# Altium PCB WAB_1_1_r3.PcbDoc (part 2 of 3)
Units mil, origin at the board's own origin, x right, y up, seen from the top; angles counter-clockwise.
Board outline 2714.17 x 3100 mil, 6 copper layers (TopLayer, GroundPlane1, MidLayer1, MidLayer2, GroundPlane2, BottomLayer), stack 59.8 mil thick; 41 components, 283 nets, 779 pads, 570 vias.
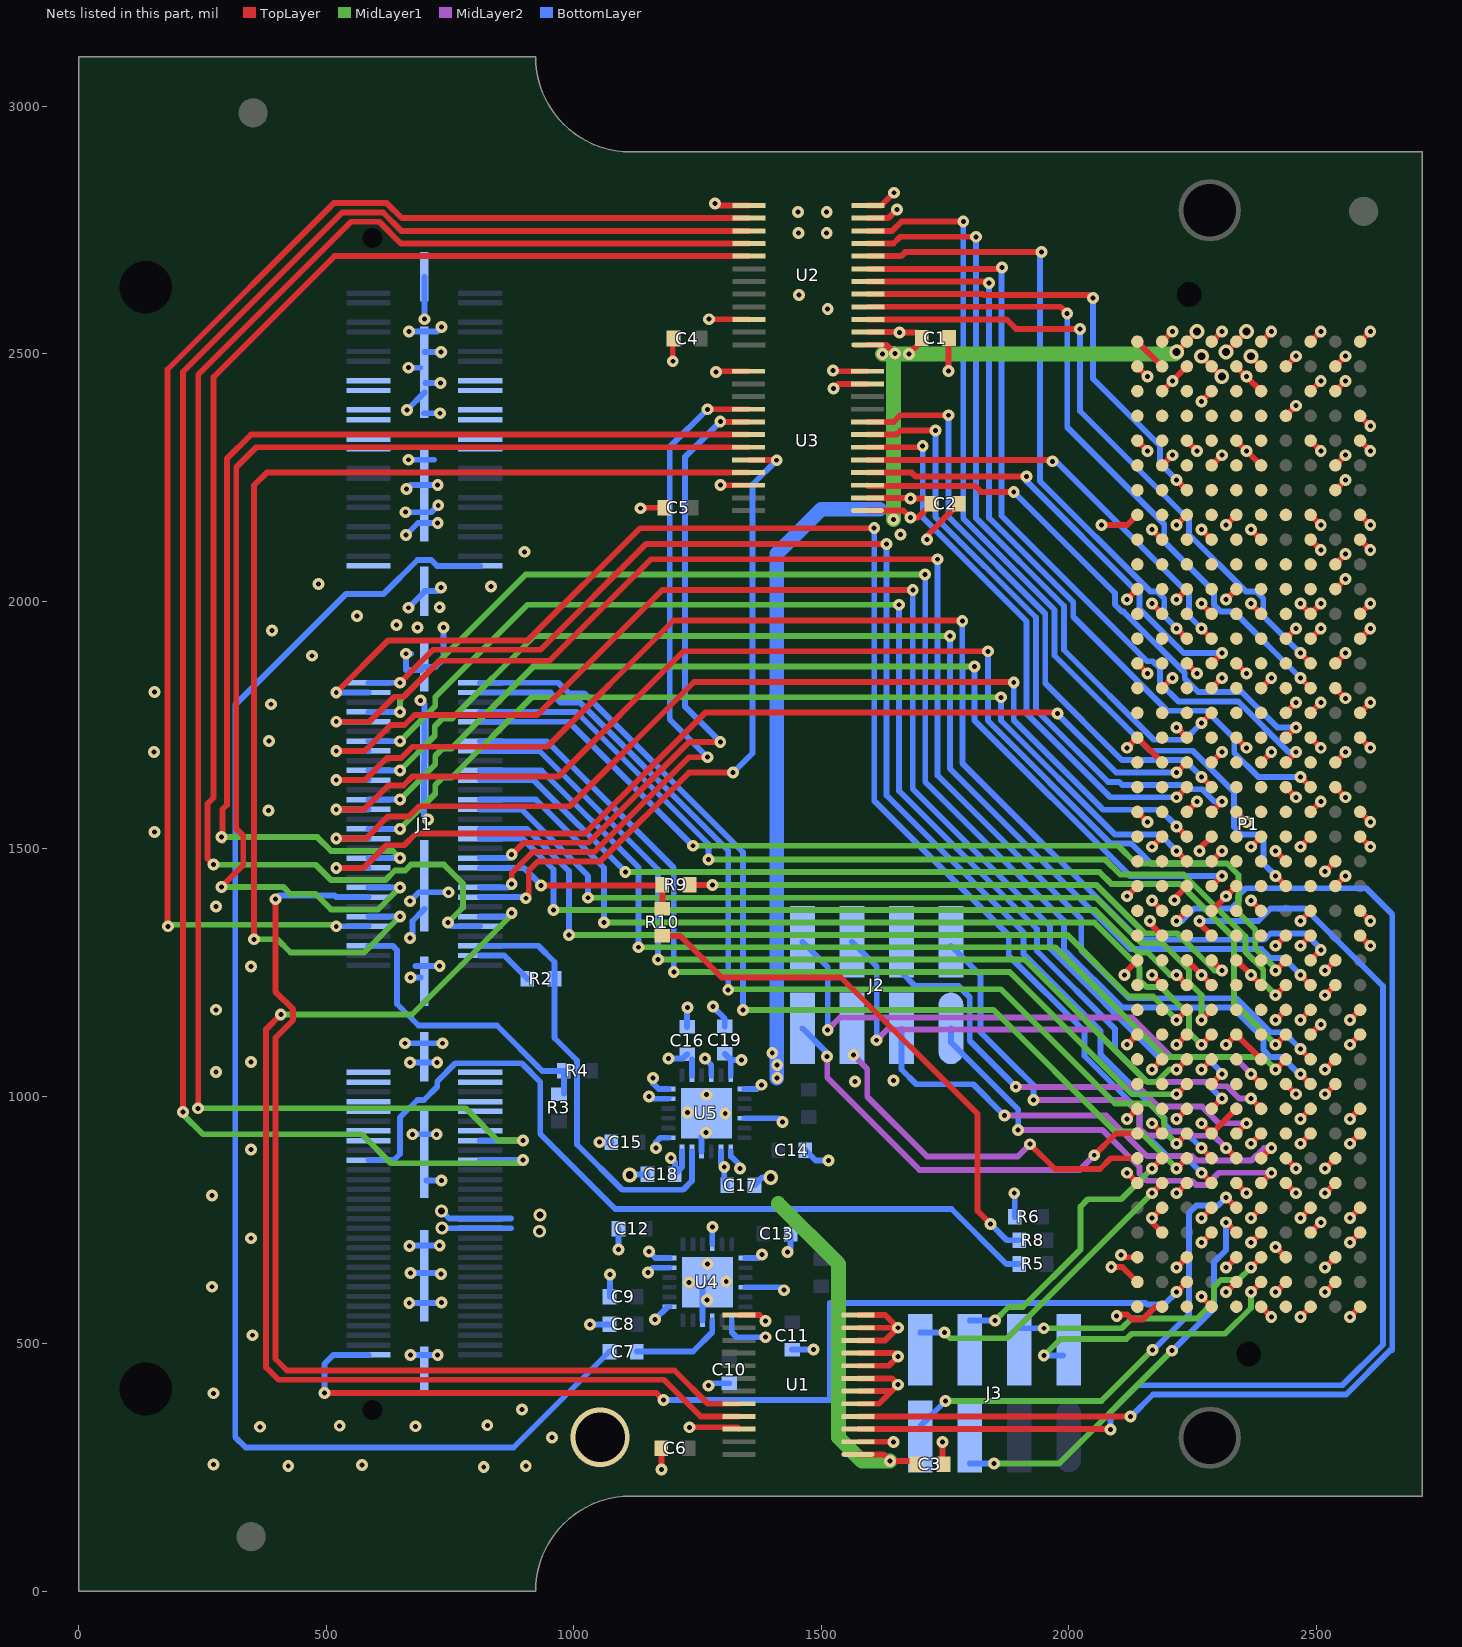
[diagram p6: the nets of this part, all layers, seen from the top]

## Via types
v1: diameter 24, hole 10, TopLayer to BottomLayer, tented both sides, 443 vias
v2: diameter 24, hole 10, TopLayer to BottomLayer, tented top, 56 vias
v3: diameter 26, hole 14, TopLayer to BottomLayer, tented both sides, 33 vias
v4: diameter 30, hole 16, TopLayer to BottomLayer, tented both sides, 32 vias
v5: diameter 250, hole 125, TopLayer to BottomLayer, tented both sides, 4 vias
v6: diameter 120, hole 100, TopLayer to BottomLayer, 1 vias
v7: diameter 24, hole 10, TopLayer to BottomLayer, 1 vias

## Nets (pads, with @x,y where several pads share a name; then routed paths per layer and width w, separated by ;. In a path a pad name is that pad's centre, name@x,y a point inside that pad or via, vN(x,y) a via of type N, cw(c..) or ccw(c..) an arc to the next point about the centre after c; other vN are vias at no path point) (continued)
GND: C1.1 C2.1 C3.1 C4.1 C5.1 C6.1 C8.1 C9.1 C10.1 C11.1 C12.1 C13.1 C14.1 C15.1 C16.1 C17.1 C18.1 C19.1 J1.161 J1.162 J1.163 J1.164 J1.165 J1.166 J1.167 J1.168 J1.169 J1.170 J1.171 J1.172 P1.A1 P1.A4 P1.A5 P1.A8 P1.A9 P1.A12 P1.A13 P1.A16 P1.A17 P1.A20 P1.A21 P1.A24 P1.A25 P1.A28 P1.A29 P1.A32 P1.A33 P1.A36 P1.A37 P1.A40 P1.B2 P1.B3 P1.B6 P1.B7 P1.B10 P1.B11 P1.B14 P1.B15 P1.B18 P1.B19 P1.B22 P1.B23 P1.B26 P1.B27 P1.B30 P1.B31 P1.B34 P1.B35 P1.B38 P1.B39 P1.C1 P1.C4 P1.C5 P1.C8 P1.C9 P1.C12 P1.C13 P1.C16 P1.C17 P1.C20 P1.C21 P1.C24 P1.C25 P1.C28 P1.C29 P1.C32 P1.C33 P1.C36 P1.C38 P1.C40 P1.D2 P1.D3 P1.D6 P1.D7 P1.D10 P1.D13 P1.D16 P1.D19 P1.D22 P1.D25 P1.D28 P1.D37 P1.D39 P1.E1 P1.E4 P1.E5 P1.E8 P1.E11 P1.E14 P1.E17 P1.E20 P1.E23 P1.E26 P1.E29 P1.E32 P1.E35 P1.E38 P1.E40 P1.F2 P1.F3 P1.F6 P1.F9 P1.F12 P1.F15 P1.F18 P1.F21 P1.F24 P1.F27 P1.F30 P1.F33 P1.F36 P1.F39 P1.G1 P1.G4 P1.G5 P1.G8 P1.G11 P1.G14 P1.G17 P1.G20 P1.G23 P1.G26 P1.G29 P1.G32 P1.G35 P1.G38 P1.G40 P1.H3 P1.H6 P1.H9 P1.H12 P1.H15 P1.H18 P1.H21 P1.H24 P1.H27 P1.H30 P1.H33 P1.H36 P1.H39 P1.J1 P1.J4 P1.J5 P1.J8 P1.J11 P1.J14 P1.J17 P1.J20 P1.J23 P1.J26 P1.J29 P1.J32 P1.J35 P1.J38 P1.J40 P1.K2 P1.K3 P1.K6 P1.K9 P1.K12 P1.K15 P1.K18 P1.K21 P1.K24 P1.K27 P1.K30 P1.K33 P1.K36 P1.K39 R6.2 U1.2 U1.5 U1.6 U1.7 U1.8 U1.9 U1.10 U1.11 U1.12 U1.13 U1.22 U2.11 U2.12 U2.13 U2.22 U3.11 U3.12 U3.13 U3.22 U4.1 U4.4 U4.7 U4.11 U4.12 U4.16 U4.19 U4.22 U4.25 U5.1 U5.4 U5.7 U5.11 U5.12 U5.16 U5.19 U5.22 U5.25 | length 10021.2
  TopLayer w11.83: v1@1136,2189 C5.1@1183,2189 ; v1(1177,246) C6.1@1177,289 ; v1(1200,2485) C4.1@1200,2529.44 ; v1(1234,331) 1234.08,330.92 1330.44,330.92 U1.22@1333.92,327.43 ; v1(1273,2570) 1353.36,2570 U2.22@1353.92,2569.43 ; v1(1285,2804) 1289.25,2799.75 U2.13@1353.92,2799.75 ; v1(1287,2463) 1288.75,2464.75 U3.13@1352.92,2464.75 ; v1(1296.61,2235) 1297.18,2234.43 U3.22@1352.92,2234.43 ; U1.13@1333.92,557.75 1375.25,557.75 v1(1387,546) ; v1(1525,2430) 1534.16,2439.16 U3.11@1593.08,2439.16 ; v1@1525.25,2464.75 U3.12@1593.08,2464.75 ; U1.2@1574.08,301.84 v1@1645.04,301.84 ; U1.5@1574.08,378.61 1616.61,378.61 1642.2,404.2 ; U1.6@1574.08,404.2 1642.2,404.2 ; U1.7@1574.08,429.79 1642.21,429.79 v1(1655,417) 1642.2,404.2 ; U1.8@1574.08,455.39 1636.39,455.39 v1(1655,474) 1648.02,480.98 U1.9@1574.08,480.98 ; U1.10@1574.08,506.57 1629.41,506.57 v1(1655,532.16) ; U1.11@1574.08,532.16 v1(1655,532.16) ; U1.12@1574.08,557.75 1629.41,557.75 v1(1655,532.16) ; U2.11@1594.08,2774.16 1635.16,2774.16 v1(1653,2792) ; U2.12@1594.08,2799.75 1621.2,2799.75 v1(1647,2825.55) ; v1(1714,2124.61) 1714,2133 C2.1@1778,2197 ; C3.1@1745,258 v1(1745,300.88) ; v1(1757,2465) C1.1@1757,2531 ; v1(2066.17,2154) 2118.17,2154 P1.K33@2138.78,2174.61 ; v1(2086,655) 2108.39,655 P1.K2@2138.78,624.61 ; v1(2097,556) 2100,559 2118.3,559 2128.21,549.09 2149.35,549.09 2174.86,574.61 P1.J1@2188.78,574.61 ; v1(2106,679) 2110.39,674.61 P1.K3@2138.78,674.61 ; v1(2113,1245.21) 2113,1248.83 P1.K15@2138.78,1274.61 ; v1(2118.17,845.21) P1.K6@2138.78,824.61 ; v1(2118.17,954) P1.K9@2138.78,974.61 ; v1(2118.17,1104) P1.K12@2138.78,1124.61 ; v1(2118.17,1404) P1.K18@2138.78,1424.61 ; v1(2118.17,1704) P1.K24@2138.78,1724.61 P1.J23@2188.78,1674.61 ; v1(2118.17,2004) P1.K30@2138.78,2024.61 ; P1.K21@2138.78,1574.61 v1(2159.39,1554) ; P1.K27@2138.78,1874.61 v1(2159.39,1854) ; P1.K36@2138.78,2324.61 v1(2159.39,2304) ; P1.K39@2138.78,2474.61 v1(2159.39,2454) ; v1(2168.17,945.21) P1.J8@2188.78,924.61 ; v1(2168.17,1054) P1.J11@2188.78,1074.61 ; v1(2168.17,1245.21) P1.J14@2188.78,1224.61 ; v1(2168.17,1395.21) P1.J17@2188.78,1374.61 ; v1(2168.17,1504) P1.J20@2188.78,1524.61 ; v1(2168.17,1995.21) P1.J29@2188.78,1974.61 ; v1(2168.17,2145.21) P1.J32@2188.78,2124.61 ; P1.J4@2188.78,724.61 2168.17,745.21 v1(2168.17,754) P1.J5@2188.78,774.61 ; P1.J26@2188.78,1824.61 v1(2209.39,1845.21) ; P1.J35@2188.78,2274.61 v1(2209.39,2295.21) ; P1.J38@2188.78,2424.61 v1(2209.39,2445.21) P1.H39@2238.78,2474.61 ; P1.J40@2188.78,2524.61 v1(2209.39,2545.21) ; v1(2214,1396) 2214,1399.83 P1.H18@2238.78,1424.61 ; v1(2218.17,654) P1.H3@2238.78,674.61 ; v1(2218.17,804) P1.H6@2238.78,824.61 ; v1(2218.17,954) P1.H9@2238.78,974.61 ; v1(2218.17,1104) P1.H12@2238.78,1124.61 ; v1(2218.17,1745.21) P1.H24@2238.78,1724.61 ; v1(2218.17,2004) P1.H30@2238.78,2024.61 ; v1(2218.17,2154) P1.H33@2238.78,2174.61 ; P1.H15@2238.78,1274.61 v1(2268.17,1245.21) P1.G14@2288.78,1224.61 ; P1.H21@2238.78,1574.61 v1(2259.39,1595.21) ; P1.H27@2238.78,1874.61 v1(2259.39,1854) ; P1.H36@2238.78,2324.61 v1(2259.39,2304) ; v1(2264,1495.21) 2264,1499.83 P1.G20@2288.78,1524.61 ; v1(2268.17,595.21) P1.G1@2288.78,574.61 ; v1(2268.17,704) P1.G4@2288.78,724.61 ; v1(2268.17,754) P1.G5@2288.78,774.61 ; v1(2268.17,945.21) P1.G8@2288.78,924.61 P1.F9@2338.78,974.61 ; v1(2268.17,1054) P1.G11@2288.78,1074.61 ; v1(2268.17,1995.21) P1.G29@2288.78,1974.61 ; v1(2268.17,2145.21) P1.G32@2288.78,2124.61 ; v1(2268.17,2404) P1.G38@2288.78,2424.61 ; P1.G17@2288.78,1374.61 v1(2318.17,1404) P1.F18@2338.78,1424.61 ; P1.G23@2288.78,1674.61 v1(2309.39,1695.21) ; P1.G26@2288.78,1824.61 v1(2309.39,1845.21) ; P1.G35@2288.78,2274.61 v1(2309.39,2295.21) ; P1.G40@2288.78,2524.61 v1(2309.39,2545.21) ; v1(2318.17,604) P1.F2@2338.78,624.61 ; v1(2318.17,654) P1.F3@2338.78,674.61 ; v1(2318.17,1104) P1.F12@2338.78,1124.61 P1.E11@2388.78,1074.61 ; v1(2318.17,2004) P1.F30@2338.78,2024.61 ; v1(2318.17,2154) P1.F33@2338.78,2174.61 ; P1.F6@2338.78,824.61 v1(2359.39,804) ; P1.F15@2338.78,1274.61 v1(2368.17,1245.21) P1.E14@2388.78,1224.61 ; P1.F21@2338.78,1574.61 v1(2359.39,1554) ; P1.F24@2338.78,1724.61 v1(2359.39,1704) ; P1.F27@2338.78,1874.61 v1(2359.39,1854) ; P1.F36@2338.78,2324.61 v1(2359.39,2304) P1.E35@2388.78,2274.61 ; P1.F39@2338.78,2474.61 v1(2359.39,2454) P1.E38@2388.78,2424.61 ; v1(2368.17,704) P1.E4@2388.78,724.61 ; v1(2368.17,754) P1.E5@2388.78,774.61 ; v1(2368.17,904) P1.E8@2388.78,924.61 ; v1(2368.17,1395.21) P1.E17@2388.78,1374.61 ; v1(2368.17,1504) P1.E20@2388.78,1524.61 ; v1(2368.17,1995.21) P1.E29@2388.78,1974.61 ; v1(2368.17,2145.21) P1.E32@2388.78,2124.61 ; P1.E1@2388.78,574.61 v1(2409.39,554) ; P1.E23@2388.78,1674.61 v1(2409.39,1695.21) ; P1.E26@2388.78,1824.61 v1(2409.39,1845.21) ; P1.E40@2388.78,2524.61 v1(2409.39,2545.21) ; v1(2418.17,604) P1.D2@2438.78,624.61 ; v1(2418.17,695.21) P1.D3@2438.78,674.61 ; v1(2418.17,1154) P1.D13@2438.78,1174.61 ; v1(2418.17,1304) P1.D16@2438.78,1324.61 ; v1(2418.17,1495.21) P1.D19@2438.78,1474.61 ; P1.D6@2438.78,824.61 v1(2459.39,804) ; P1.D7@2438.78,874.61 v1(2459.39,854) ; P1.D10@2438.78,1024.61 v1(2459.39,1004) ; P1.D22@2438.78,1624.61 v1(2459.39,1604) ; P1.D25@2438.78,1774.61 v1(2459.39,1795.21) ; P1.D28@2438.78,1924.61 v1(2459.39,1945.21) ; P1.D37@2438.78,2374.61 v1(2459.39,2395.21) ; P1.D39@2438.78,2474.61 v1(2459.39,2495.21) ; v1(2468.17,554) P1.C1@2488.78,574.61 ; v1(2468.17,754) P1.C5@2488.78,774.61 ; v1(2468.17,904) P1.C8@2488.78,924.61 ; v1(2468.17,954) P1.C9@2488.78,974.61 ; v1(2468.17,1154) P1.C13@2488.78,1174.61 ; v1(2468.17,1304) P1.C16@2488.78,1324.61 ; v1(2468.17,1354) P1.C17@2488.78,1374.61 ; v1(2468.17,1504) P1.C20@2488.78,1524.61 ; v1(2468.17,1995.21) P1.C29@2488.78,1974.61 v1(2509.39,1995.21) ; P1.C4@2488.78,724.61 v1(2509.39,745.21) ; P1.C12@2488.78,1124.61 v1(2509.39,1145.21) ; P1.C21@2488.78,1574.61 v1(2509.39,1595.21) ; P1.C24@2488.78,1724.61 v1(2509.39,1704) ; P1.C25@2488.78,1774.61 v1(2509.39,1795.21) ; P1.C28@2488.78,1924.61 v1(2509.39,1945.21) ; P1.C32@2488.78,2124.61 v1(2509.39,2104) ; P1.C33@2488.78,2174.61 v1(2509.39,2154) ; P1.C36@2488.78,2324.61 v1(2509.39,2304) ; P1.C38@2488.78,2424.61 v1(2509.39,2445.21) ; P1.C40@2488.78,2524.61 v1(2509.39,2545.21) ; v1(2518.17,604) P1.B2@2538.78,624.61 ; v1(2518.17,654) P1.B3@2538.78,674.61 ; v1(2518.17,804) P1.B6@2538.78,824.61 ; v1(2518.17,854) P1.B7@2538.78,874.61 ; v1(2518.17,1004) P1.B10@2538.78,1024.61 ; v1(2518.17,1054) P1.B11@2538.78,1074.61 ; v1(2518.17,1204) P1.B14@2538.78,1224.61 ; v1(2518.17,1254) P1.B15@2538.78,1274.61 ; v1(2518.17,1454) P1.B19@2538.78,1474.61 ; P1.B18@2538.78,1424.61 v1(2559.39,1445.21) ; P1.B22@2538.78,1624.61 v1(2559.39,1604) ; P1.B23@2538.78,1674.61 v1(2559.39,1695.21) ; P1.B26@2538.78,1824.61 v1(2559.39,1804) ; P1.B27@2538.78,1874.61 v1(2559.39,1895.21) ; P1.B30@2538.78,2024.61 v1(2559.39,2045.21) ; P1.B31@2538.78,2074.61 v1(2559.39,2095.21) ; P1.B34@2538.78,2224.61 v1(2559.39,2245.21) ; P1.B35@2538.78,2274.61 v1(2559.39,2295.21) ; P1.B38@2538.78,2424.61 v1(2559.39,2445.21) ; P1.B39@2538.78,2474.61 v1(2559.39,2495.21) ; v1(2568.17,554) P1.A1@2588.78,574.61 ; v1(2568.17,704) P1.A4@2588.78,724.61 ; v1(2568.17,754) P1.A5@2588.78,774.61 ; v1(2568.17,904) P1.A8@2588.78,924.61 ; v1(2568.17,954) P1.A9@2588.78,974.61 ; v1(2568.17,1104) P1.A12@2588.78,1124.61 ; v1(2568.17,1154) P1.A13@2588.78,1174.61 ; P1.A16@2588.78,1324.61 v1(2609.39,1304) ; P1.A17@2588.78,1374.61 v1(2609.39,1354) ; P1.A20@2588.78,1524.61 v1(2609.39,1504) ; P1.A21@2588.78,1574.61 v1(2609.39,1554) ; P1.A24@2588.78,1724.61 v1(2609.39,1704) ; P1.A25@2588.78,1774.61 v1(2609.39,1795.21) ; P1.A28@2588.78,1924.61 v1(2609.39,1945.21) ; P1.A29@2588.78,1974.61 v1(2609.39,1995.21) ; P1.A32@2588.78,2124.61 v1(2609.39,2104) ; P1.A33@2588.78,2174.61 v1(2609.39,2154) ; P1.A36@2588.78,2324.61 v1(2609.39,2304) ; P1.A37@2588.78,2374.61 v1(2609.39,2354) ; P1.A40@2588.78,2524.61 v1(2609.39,2545.21)
  BottomLayer w11.83: v1(659,1107) v1(735,1107) ; v1(660,2180) 712.06,2180 v1(726.06,2194) ; v1(661,2134) 685,2158 v1(725,2158) ; v1(663,2386.61) J1.162@698,2421.61 ; v1(666,1987) J1.164@698,2019 ; v1(666,2286) 718,2286 ; v1(666,2472) 689,2472 ; v1(667,2545) 724,2545 v1(733,2554) ; v1(667.5,582) v1@732,582 ; v1@669,698 v1(729,698) ; v1(669,1068) v1(724,1068) ; v1(669,1320) 673.92,1324.92 673.92,1353.92 J1.167@698,1378 ; v1(669,1394) 687,1412 v1(747,1412) ; v1(670,643) v1@730,643 ; v1(670,1240) J1.168@690.5,1240 ; v1@670,2235 v1(725,2235) ; v1@670.17,477 v1(725,477) ; v1@671.5,1894 v1(661,1894) 661,1861 691.5,1861 J1.165@698,1867.5 720.5,1867.5 737,1884 v1(737,1947) ; v1(673.92,923) v1(723,923) ; 680,1263 v1(729,1263) ; v1(690,1800) 698,1792 J1.166@698,1675 ; J1.162@697,2380 v1(730,2380) ; J1.166@697.42,1674.42 697.42,1566.58 v1(705,1559) ; J1.164@698,2020.5 v1@724.5,2020.5 ; J1.162@698,2504 739,2504 732,2497 v1(732,2504) ; v1(698,2570) J1.161@698,2655.5 ; J1.162@700,2441 v1(731,2441) ; J1.170@702.65,830 v1(733,830) ; v1(1033,539) C8.1@1072,539 ; v1(1052,907) C15.1@1076,907 ; C9.1@1073,595.35 v1(1073,640) ; v1(1090.32,690) C12.1@1090.32,732 ; v4(1113,841) 1114,842 C18.1@1149,842 ; v1(1150,644) 1159.41,653.41 U4.11@1193.13,653.41 ; v1(1152,686) 1164.91,673.09 U4.12@1193.13,673.09 ; v1@1158.45,994.76 U5.11@1191.13,994.76 ; v1(1160,1037) 1160,1026 1171.55,1014.45 U5.12@1191.13,1014.45 ; v1(1164,549) 1189.67,574.67 U4.7@1193.13,574.67 ; v1(1166,895.21) 1166,907.47 1174.55,916.02 U5.7@1191.13,916.02 ; C16.1@1229,1140 v1@1229,1178 ; U5.4@1258.16,888.37 U5.25@1258.16,918.16 ; U4.4@1260.16,547.02 1260.16,614.04 U4.25@1270,623.88 ; v1(1265,1076) 1277.84,1063.16 U5.16@1277.84,1042.1 ; v1(1272.41,415) 1277.41,420 C10.1@1314,420 ; U4.16@1279.84,700.75 v1@1279.84,735.84 ; v1(1281,1181) 1305,1157 C19.1@1305,1141 ; U5.1@1317.21,888.37 1317.21,879.02 1336,860.24 v1(1336,854) ; U4.1@1319.21,547.02 1319.21,522.79 1329,513 v1(1387,513) ; U5.22@1344.87,955.39 1414.61,955.39 v1(1422,948) ; U5.19@1344.87,1014.45 1370.45,1014.45 v1(1379,1023) ; U4.22@1346.87,614.04 1418.96,614.04 v1(1425,608) ; U4.19@1346.87,673.09 1373.47,673.09 v1(1380.38,680) ; C17.1@1365,820 1381,836 v4(1398,836) ; v1(1432,685) 1438,691 C13.1@1438,722 ; C11.1@1441,488 v1(1484,488) ; C14.1@1468,891 1489,870 v1(1515,870) ; R6.2@1890.88,756 v1@1890.88,803.12
  other v1: 818,251.03 423,253 903,253 572,255 272,256 1646,300.88 956,310 366,332 680.12,333 527,334 825.17,335 895,367 272,399.7 670,477.17 351,517 733,583 1269,588 269,615 1233,623.88 1308,625.83 732,641 1270,661 668,697 348,713 1280,736 269,799 1890,804 348,892 1267,927 1306,965.24 1230,967 1152,999 1268,1003 1568,1030 1646,1032 277,1049 348,1069 277,1174.61 1230,1179 348,1262 277,1383 153,1534 383,1577 152,1695.21 384,1718 388,1792 153,1817 471,1890 390,1941 684.15,1947 642,1952 562,1970 729,1988 732,2028 833,2030 484,2035 900,2100 1135,2188 662,2227 1524,2466 1513,2591 1455,2618.58 1454,2744 1511,2744 1453,2787 1511,2787
HA00_CC_N: J3.4 P1.F5 | length 960.2
  TopLayer w11.83: v1(2318.17,795.21) P1.F5@2338.78,774.61
  MidLayer2 w11.83: v1@2168,486 v1(2169,487)
  MidLayer1 w11.83: v1(1751,384) 2066,384 v1(2169,487)
  BottomLayer w11.83: J3.4@1700,333 v1(1751,384) ; v1(2169,487) 2170.78,487 2243.26,559.48 2243.26,764.32 2257.85,778.92 2301.88,778.92 v1(2318.17,795.21)
HA00_CC_P: J3.3 P1.F4 | length 837.2
  TopLayer w11.83: v1(2318.17,745.21) P1.F4@2338.78,724.61
  MidLayer1 w11.83: v1(1849,258) 1980.76,258 2208.51,485.74 v1(2209,485.74)
  BottomLayer w11.83: J3.3@1800,258 v1(1849,258) ; v1(2209,485.74) 2293.26,570 2293.26,664.32 2318.17,689.24 v1(2318.17,745.21)
HA01_CC_N: J3.6 P1.E3 | length 565
  TopLayer w11.83: v1(2368.17,654) P1.E3@2388.78,674.61
  MidLayer1 w11.83: v1@1950,531.08 2107.32,531.08 2127.24,551 2259.2,551 2293.09,584.89 2293.09,614.15 2307.85,628.92 2343.09,628.92 v1(2368.17,654)
  BottomLayer w11.83: J3.6@1900,531.08 v1(1949.66,531.08)
HA01_CC_P: J3.5 P1.E2 | length 558
  TopLayer w11.83: v1(2368.17,604) P1.E2@2388.78,624.61
  MidLayer1 w11.83: v1@1950,476 1983.25,509.25 2116.36,509.25 2127.11,520 2316,520 2368.17,572.17 v1(2368.17,604)
  BottomLayer w11.83: v1(1949.66,476) J3.5@1988.63,476
HA02_N: J2.4 P1.K8 | length 854.5
  TopLayer w11.83: v1(2051.67,880.67) 2095.61,924.61 P1.K8@2138.78,924.61
  MidLayer2 w11.83: v1(1511.97,1080) 1511.97,1037.73 1698.52,851.18 2022.18,851.18 v1(2051.67,880.67)
  BottomLayer w11.83: J2.4@1462,1137 1511.97,1087.03 v1(1511.97,1080)
HA02_P: J2.3 P1.K7 | length 732.1
  TopLayer w11.83: v1(1922,903) 1972.25,852.75 2063.23,852.75 2085.09,874.61 P1.K7@2138.78,874.61
  MidLayer2 w11.83: v7(1565,1083.41) 1565,1082.83 1592.92,1054.92 1592.92,999.08 1714,878 1897,878 v1(1922,903)
HA03_N: J3.7 P1.J7 | length 574.8
  TopLayer w11.83: v1(2168.17,854) P1.J7@2188.78,874.61
  MidLayer1 w11.83: v1@1851.34,547 1878.43,574.08 1907.38,574.08 2024.08,690.78 2024.08,777.24 2038.68,791.83 2106.01,791.83 v1(2168.17,854)
  BottomLayer w11.83: J3.7@1800,547 v1(1851,547)
HA03_P: J3.8 P1.J6 | length 623.3
  TopLayer w11.83: v1(2168.17,804) P1.J6@2188.78,824.61
  MidLayer1 w11.83: v1(1749.17,522.17) 1760.34,511 1875.17,511 v1(2168.17,804)
  BottomLayer w11.83: J3.8@1700,522.17 v1(1749.17,522.17)
HA04_N: J2.6 P1.F8 | length 904.2
  TopLayer w11.83: P1.F8@2338.78,924.61 v1(2359.39,945.21)
  MidLayer2 w11.83: v1@1893,1018.64 2141.66,1018.64 2181.39,978.92 2269.71,978.92 2303.41,945.21 v1(2359.39,945.21)
  BottomLayer w11.83: J2.6@1662,1250.1 1689.75,1222.36 1777.71,1222.36 1799.92,1200.15 1799.92,1112.19 v1(1893,1019.1)
HA04_P: J2.5 P1.F7 | length 864.1
  TopLayer w11.83: v1(2318.17,895.21) P1.F7@2338.78,874.61
  MidLayer2 w11.83: v1(1929,992) 2115.41,992 2143.26,964.15 2143.26,934.89 2157.85,920.3 2199.23,920.3 2207.85,928.92 2243.26,928.92 2252.05,920.13 2293.26,920.13 v1(2318.17,895.21)
  BottomLayer w11.83: J2.5@1762,1303.94 1821.75,1244.19 1821.75,1129.25 1903.98,1047.02 1904.56,1047.02 1929,1022.58 v1(1929,992)
HA05_N: J2.2 P1.E7 | length 944.9
  TopLayer w11.83: P1.E7@2388.78,874.61 v1(2409.39,895.21)
  MidLayer2 w11.83: v1(1870,961) 2075.94,961 2157.85,879.08 2249.07,879.08 2257.85,870.3 2369.71,870.3 2394.62,895.21 v1(2409.39,895.21)
  BottomLayer w11.83: J2.2@1662,1135.94 1662,1054 1692,1024 1807,1024 v1(1870,961)
HA05_P: J2.1 P1.E6 | length 866.9
  TopLayer w11.83: P1.E6@2388.78,824.61 v1(2409.39,845.21)
  MidLayer2 w11.83: v1(1897.41,932) 2068,932 2143.26,856.74 2143.26,843.68 2157.85,829.08 2249.07,829.08 2257.85,820.3 2278.49,820.3 2303.41,845.21 v1(2409.39,845.21)
  BottomLayer w11.83: J2.1@1762,1137 1762,1109 1897.92,973.08 1897.92,932.5 v1(1897.41,932)
HA06_N: P1.K11
HA06_P: P1.K10
HA07_N: P1.J10
HA07_P: P1.J9
HA08_N: P1.F11
HA08_P: P1.F10
HA09_N: J2.8 P1.E10 | length 1140.9
  TopLayer w11.83: v1(2368.17,1045.21) P1.E10@2388.78,1024.61
  MidLayer2 w11.83: v1(1513,1134) 1538,1159 2127.94,1159 2207.85,1079.08 2334.3,1079.08 v1(2368.17,1045.21)
  BottomLayer w11.83: J2.8@1462,1312 1513,1261 v1(1513,1134)
HA09_P: J2.7 P1.E9 | length 1072
  TopLayer w11.83: v1(2368.17,995.21) P1.E9@2388.78,974.61
  MidLayer2 w11.83: v1(1612,1113) 1634,1135 2051.94,1135 2157.85,1029.08 2277,1029.08 2285.96,1020.13 2319.71,1020.13 2344.62,995.21 v1(2368.17,995.21)
  BottomLayer w11.83: J2.7@1562,1312 1612,1262 v1(1612,1113)
HA10_N: P1.K14
HA10_P: P1.K13
HA11_N: P1.J13
HA11_P: P1.J12
HA12_N: P1.F14
HA12_P: P1.F13
HA13_N: P1.E13
HA13_P: P1.E12
HA14_N: P1.J16 | length 39.7
  TopLayer w11.83: v1(2164,1354) 2164,1349.39 P1.J16@2188.78,1324.61
HA14_P: P1.J15
HA15_N: P1.F17
HA15_P: P1.F16
HA16_N: P1.E16
HA16_P: P1.E15
HA17_CC_N: P1.K17
HA17_CC_P: P1.K16
HA18_N: P1.J19
HA18_P: P1.J18
HA19_N: P1.F20
HA19_P: P1.F19
HA20_N: P1.E19
HA20_P: P1.E18
HA21_N: P1.K20
HA21_P: P1.K19
HA22_N: P1.J22
HA22_P: P1.J21
HA23_N: P1.K23
HA23_P: P1.K22
HB00_CC_N: P1.K26
HB00_CC_P: P1.K25
HB01_N: P1.J25
HB01_P: P1.J24
HB02_N: P1.F23
HB02_P: P1.F22
HB03_N: P1.E22
HB03_P: P1.E21
HB04_N: P1.F26
HB04_P: P1.F25
HB05_N: P1.E25
HB05_P: P1.E24
HB06_CC_N: P1.K29
HB06_CC_P: P1.K28
HB07_N: P1.J28
HB07_P: P1.J27
HB08_N: P1.F29
HB08_P: P1.F28
HB09_N: P1.E28
HB09_P: P1.E27
HB10_N: P1.K32
HB10_P: P1.K31
HB11_N: P1.J31
HB11_P: P1.J30
HB12_N: P1.F32
HB12_P: P1.F31
HB13_N: P1.E31
HB13_P: P1.E30
HB14_N: P1.K35
HB14_P: P1.K34
HB15_N: P1.J34
HB15_P: P1.J33
HB16_N: P1.F35
HB16_P: P1.F34
HB17_CC_N: P1.K38
HB17_CC_P: P1.K37
HB18_N: P1.J37
HB18_P: P1.J36
HB19_N: P1.E34
HB19_P: P1.E33
HB20_N: P1.F38
HB20_P: P1.F37
HB21_N: P1.E37
HB21_P: P1.E36
HSMC_XCVR_RXN2: J1.24
HSMC_XCVR_RXN3: J1.20
HSMC_XCVR_RXN4: J1.16
HSMC_XCVR_RXP2: J1.22
HSMC_XCVR_RXP3: J1.18
HSMC_XCVR_RXP4: J1.14
HSMC_XCVR_TXN2: J1.23
HSMC_XCVR_TXN3: J1.19
HSMC_XCVR_TXN4: J1.15
HSMC_XCVR_TXP2: J1.21
HSMC_XCVR_TXP3: J1.17
HSMC_XCVR_TXP4: J1.13
JTAG_TCK: P1.D29
JTAG_TDI: P1.D30
JTAG_TDO: P1.D31
JTAG_TMS: P1.D33
LA00_CC_N: J1.42 P1.G7 | length 2691.9
  TopLayer w11.83: v1(649,1835.43) 715.57,1902 932.64,1902 1146.64,2116 v2(1632,2116) ; v1(2268.17,895.21) P1.G7@2288.78,874.61
  BottomLayer w11.83: J1.42@585.25,1835.43 v1(649,1835.43) ; v2(1632,2116) 1632,1607.81 1909,1330.81 1909,1287 2064,1132 2064,1084.62 2193.26,955.36 2193.26,943.68 2207.85,929.08 2234.3,929.08 v1(2268.17,895.21)
LA00_CC_P: J1.44 P1.G6 | length 2916.1
  TopLayer w11.83: v1(520,1815.75) 625.25,1921 907,1921 1133.57,2147.57 v2@1607,2147.57 ; v1(2268.17,845.21) P1.G6@2288.78,824.61
  BottomLayer w11.83: v1(520,1815.75) J1.44@585.25,1815.75 ; v2(1607,2148) 1607,1597 1879,1325 1879,1284 2032,1131 2032,1081.39 2143.26,970.13 2143.26,934.89 2199.07,879.08 2234.3,879.08 v1(2268.17,845.21)
LA01_CC_N: P1.D9
LA01_CC_P: P1.D8
LA02_N: J1.43 P1.H8 | length 1994.9
  TopLayer w11.83: v1(2218.17,904) P1.H8@2238.78,924.61
  MidLayer1 w11.83: v2@1312,1216 1863,1216 2093.83,985.17 2163.45,985.17 2193.09,955.53 2193.09,929.08 v1(2218.17,904)
  BottomLayer w11.83: J1.43@810.75,1815.75 953.1,1815.75 973.64,1795.21 1013.14,1795.21 1312,1496.35 v2(1312,1215)
LA02_P: J1.41 P1.H7 | length 2029.9
  TopLayer w11.83: v2(2218.17,854) P1.H7@2238.78,874.61
  MidLayer1 w11.83: v2(1342,1174) 1848.34,1174 2093.26,929.08 2143.09,929.08 v2(2218.17,854)
  BottomLayer w11.83: J1.41@810.75,1835.43 968.65,1835.43 990.04,1814.04 1020.94,1814.04 1342,1492.98 v2(1342,1174)
LA03_N: J1.56 P1.G10 | length 2687.5
  TopLayer w11.83: v1(520,1697.64) 577.64,1697.64 630,1750 658,1750 678,1770 925.71,1770 1178.71,2023 v2(1685,2023) ; P1.G10@2288.78,1024.61 v1(2309.39,1045.21)
  BottomLayer w11.83: v1(520,1697.64) J1.56@585.25,1697.64 ; v2(1685,2023) 1685,1620.59 1962,1343.59 1962,1298.31 2181.39,1078.92 2278.49,1078.92 2309.39,1048.02 v1(2309.39,1045.21)
LA03_P: J1.54 P1.G9 | length 2562.8
  TopLayer w11.83: P1.G9@2288.78,974.61 v1(2309.39,995.21)
  MidLayer1 w11.83: v1(649,1717.32) 720.08,1788.41 720.08,1806.73 906.35,1993 v2(1657,1993)
  BottomLayer w11.83: J1.54@585.25,1717.32 v1(649,1717.32) ; v2(1657,1993) 1657,1617 1936,1338 1936,1293.46 2093.26,1136.21 2093.26,1093.68 2157.85,1029.08 2275.51,1029.08 v1(2309.39,995.21)
LA04_N: J1.55 P1.H11 | length 1830.5
  TopLayer w11.83: v1(2218.17,1054) P1.H11@2238.78,1074.61
  MidLayer1 w11.83: v2(1170,1276) 1910.94,1276 2157.85,1029.08 2178.49,1029.08 2203.41,1054 v1(2218.17,1054)
  BottomLayer w11.83: J1.55@810.75,1697.64 930.47,1697.64 1170,1458.11 v2(1170,1276)
LA04_P: J1.53 P1.H10 | length 1855.3
  TopLayer w11.83: v1(2218.17,1004) P1.H10@2238.78,1024.61
  MidLayer1 w11.83: v2(1202,1251) 1881,1251 2128,1004 v1(2218.17,1004)
  BottomLayer w11.83: J1.53@810.75,1717.32 946.02,1717.32 1202,1461.35 v2(1202,1251)
LA05_N: J1.61 P1.D12 | length 1935.5
  TopLayer w11.83: v1(2418.17,1104) P1.D12@2438.78,1124.61
  MidLayer1 w11.83: v2(1104,1453) 2062,1453 2086,1429 2224.24,1429 2334.3,1318.93 2334.3,1187.87 v1(2418.17,1104)
  BottomLayer w11.83: J1.61@810.75,1638.58 919.16,1638.58 v2@1104.74,1453
LA05_P: J1.59 P1.D11 | length 1981.2
  TopLayer w11.83: v1(2418.17,1054) P1.D11@2438.78,1074.61
  MidLayer1 w11.83: v2(1131,1301) 1973,1301 2194.92,1079.08 2393.09,1079.08 v1(2418.17,1054)
  BottomLayer w11.83: J1.59@810.75,1658.27 934.71,1658.27 1131,1461.98 v2(1131,1301)
LA06_N: J1.50 P1.C11 | length 2881.4
  TopLayer w11.83: v1(520,1756.69) 586.69,1756.69 637,1807 656.25,1807 729.25,1880 950.85,1880 1155.85,2085 v2(1735,2085) ; v1(2468.17,1095.21) P1.C11@2488.78,1074.61
  BottomLayer w11.83: v1(520,1756.69) J1.50@585.25,1756.69 ; v2(1735,2085) 1735,1648.3 2025.25,1358.05 2025.25,1294.75 2122,1198 2338.94,1198 2407.85,1129.08 2434.3,1129.08 v1(2468.17,1095.21)
LA06_P: J1.48 P1.C10 | length 2751.9
  TopLayer w11.83: v1(2468.17,1045.21) P1.C10@2488.78,1024.61
  MidLayer1 w11.83: v1(649,1776.38) 649,1800 903,2054 v2(1710,2054)
  BottomLayer w11.83: J1.48@585.25,1776.38 v1(649,1776.38) ; v2(1710,2054) 1710,1635 1990.33,1354.67 1990.33,1296.61 2107.94,1179 2331.31,1179 2393.26,1117.05 2393.26,1093.68 2407.85,1079.08 2431.22,1079.08 2465.09,1045.21 v1(2468.17,1045.21)
LA07_N: J1.73 P1.H14 | length 1598.7
  TopLayer w11.83: v1(2218.17,1245.21) P1.H14@2238.78,1224.61
  MidLayer1 w11.83: v2(959,1376) 2053.5,1376 2139.33,1290.17 2159.83,1290.17 2204.79,1245.21 v1(2218.17,1245.21)
  BottomLayer w11.83: J1.73@810.75,1520.47 896.63,1520.47 959,1458.1 v2(959,1376)
LA07_P: J1.71 P1.H13 | length 1672.1
  TopLayer w11.83: v1(2218.17,1154) P1.H13@2238.78,1174.61
  MidLayer1 w11.83: v2(990,1326) 1996.98,1326 2121.51,1201.46 2170.71,1201.46 v1(2218.17,1154)
  BottomLayer w11.83: J1.71@810.75,1540.16 904.84,1540.16 990,1455 v2(990,1326)
LA08_N: J1.67 P1.G13 | length 1733.5
  TopLayer w11.83: v1(2268.17,1154) P1.G13@2288.78,1174.61
  MidLayer1 w11.83: v2(1029,1401) 2055.13,1401 2147.13,1309 2189.62,1309 2243.09,1255.53 2243.09,1229.9 2243,1229.81 2268.17,1204.64 v1(2268.17,1154)
  BottomLayer w11.83: J1.67@810.75,1579.53 894.47,1579.53 1029,1445 v2(1029,1401)
LA08_P: J1.65 P1.G12 | length 1791.8
  TopLayer w11.83: v1(2268.17,1104) P1.G12@2288.78,1124.61
  MidLayer1 w11.83: v2(1061,1351) 2051.87,1351 2143.26,1259.61 2143.26,1234.89 2157.85,1220.3 2187.11,1220.3 2243.26,1164.15 2243.26,1128.92 v1(2268.17,1104) v1@2268.17,1104.17
  BottomLayer w11.83: J1.65@810.75,1599.21 923.39,1599.21 1061,1461.61 v2(1061,1351)
LA09_N: J1.49 P1.D15 | length 1913.7
  TopLayer w11.83: v1(2418.17,1254) P1.D15@2438.78,1274.61
  MidLayer1 w11.83: v2(1240.48,1506) 2100,1506 2135.87,1470.13 2319.71,1470.13 2343.09,1446.74 2343.09,1370.91 2377,1337 2377,1298.63 2418.17,1257.46 v1(2418.17,1254)
  BottomLayer w11.83: J1.49@810.75,1756.69 989.79,1756.69 v2(1240.48,1506)
LA09_P: J1.47 P1.D14 | length 1926
  TopLayer w11.83: v1(2418.17,1204) P1.D14@2438.78,1224.61
  MidLayer1 w11.83: v2(1272,1478) 2074,1478 2104.17,1447.83 2232.04,1447.83 2357,1322.87 2357,1292 2393.09,1255.91 2393.09,1229.08 v1(2418.17,1204)
  BottomLayer w11.83: J1.47@810.75,1776.38 1005.34,1776.38 1272,1509.72 v2(1272,1478)
LA10_N: J1.62 P1.C15 | length 2673.1
  TopLayer w11.83: v1(520,1638.58) 577.58,1638.58 622.18,1683.18 651.18,1683.18 674,1706 946.56,1706 1201.56,1961 v2@1785,1961 ; P1.C15@2488.78,1274.61 v1(2509.39,1295.21)
  BottomLayer w11.83: v1(520,1638.58) J1.62@585.25,1638.58 ; v2(1785,1960) 1785.07,1769 1785.07,1672.93 2142,1316 2394.94,1316 2407.85,1328.92 2478.49,1328.92 2509.39,1298.02 v1(2509.39,1295.21)
LA10_P: J1.60 P1.C14 | length 2476.8
  TopLayer w11.83: v1(2468.17,1245.21) P1.C14@2488.78,1224.61
  MidLayer1 w11.83: v1(649,1658.27) 719.08,1728.35 719.08,1747.73 734.27,1762.92 753.65,1762.92 920.73,1930 v2(1760,1930)
  BottomLayer w11.83: J1.60@585.25,1658.27 v1(649,1658.27) ; v2(1760,1930) 1760.08,1930.08 1760.08,1661.92 2124.83,1297.17 2389.77,1297.17 2407.85,1279.08 2434.3,1279.08 v1(2468.17,1245.21)
LA11_N: P1.H17 U1.4 | length 2535
  TopLayer w11.83: U1.4@1574.08,353.02 v2@2124,353.02 ; v1(2218.17,1354) P1.H17@2238.78,1374.61
  BottomLayer w11.83: v2@2125.5,352.5 2170.17,397.17 2560.8,397.17 2651,487.37 2653.83,487.37 2653.83,1367.42 2601.13,1420.13 2357.85,1420.13 2343.09,1405.36 2343.09,1393.68 2328.49,1379.08 2253.85,1379.08 2228.76,1354 v1(2218.17,1354)
  other v2: 2125,353
LA11_P: P1.H16
LA12_N: P1.G16 U1.3 | length 2362.7
  TopLayer w11.83: U1.3@1574.08,327.43 v2@2084.57,327.43 ; v1(2264,1354) 2264,1349.39 P1.G16@2288.78,1324.61
  BottomLayer w11.83: v2(2084.57,326.57) 2084.57,361.57 2139,416 2553,416 2635,498 2635,1222.41 2478.49,1378.92 2407.85,1378.92 2382.94,1354 v1(2264,1354)
LA12_P: P1.G15 R9.2 | length 1176.4
  TopLayer w11.83: R9.2@1233.82,1427 v2(1280,1427) ; P1.G15@2288.78,1274.61 v2(2309.39,1254)
  MidLayer1 w11.83: v2(1280,1427) 2055.76,1427 2153.68,1329.08 2219.54,1329.08 2294.62,1254 v2(2309.39,1254)
LA13_N: P1.D18 U2.10 | length 1881.5
  TopLayer w11.83: U2.10@1594.08,2748.57 1643.57,2748.57 1662.5,2767.5 v2(1787,2767.5) ; v1(2418.17,1445.21) P1.D18@2438.78,1424.61
  BottomLayer w11.83: v2(1787,2767.5) 1787,2167.26 1971.5,1982.77 1971.5,1890.5 2164.08,1697.92 2250.71,1697.92 2334.3,1614.32 2334.3,1543.85 2349.23,1528.92 2378.49,1528.92 2393.26,1514.15 2393.26,1470.3 2418.17,1445.38 v1(2418.17,1445.21)
LA14_N: P1.C19
LA14_P: P1.C18
LA15_N: J1.74 P1.H20 | length 2088.8
  TopLayer w11.83: v1(520,1520.47) 579.47,1520.47 624.07,1565.07 666.42,1565.07 687.27,1585.92 991.94,1585.92 1243.02,1837 v2@1889,1837 ; v1(2218.17,1545.21) P1.H20@2238.78,1524.61
  BottomLayer w11.83: v1(520,1520.47) J1.74@585.25,1520.47 ; v2(1889,1836) 1889,1759.76 2069.85,1578.92 2184.47,1578.92 v1(2218.17,1545.21)
LA15_P: J1.72 P1.H19 | length 1938.6
  TopLayer w11.83: v1(2218.17,1495.21) P1.H19@2238.78,1474.61
  MidLayer1 w11.83: v1(649,1540.16) 720.08,1611.24 720.08,1628.73 735.27,1643.92 752.76,1643.92 914.84,1806 v2(1863,1806)
  BottomLayer w11.83: J1.72@585.25,1540.16 v1(649,1540.16) ; v2(1863,1806) 1863,1759.13 2093.05,1529.08 2184.3,1529.08 v1(2218.17,1495.21)
LA16_N: J1.68 P1.G19 | length 2286.3
  TopLayer w11.83: v1(520,1579.53) 576.53,1579.53 625,1628 656,1628 673.75,1645.75 968.33,1645.75 1221.58,1899 v2(1837,1899) ; P1.G19@2288.78,1474.61 v1(2309.39,1495.21)
  BottomLayer w11.83: v1(520,1579.53) J1.68@585.25,1579.53 ; v2(1837,1899) 1837,1758.5 2085.25,1510.25 2126.69,1510.25 2166.64,1470.3 2284.47,1470.3 v1(2309.39,1495.21)
LA16_P: J1.66 P1.G18 | length 2113.9
  TopLayer w11.83: P1.G18@2288.78,1424.61 v1(2309.39,1445.21)
  MidLayer1 w11.83: v1(649,1599.21) 720.08,1670.3 720.08,1687.73 735.27,1702.92 752.7,1702.92 917.79,1868 v2(1810,1868)
  BottomLayer w11.83: J1.66@585.25,1599.21 v1(649,1599.21) ; v2(1810,1868) 1810,1758.87 2123.65,1445.21 v1(2309.39,1445.21)
LA17_CC_N: P1.D21
LA17_CC_P: P1.D20
LA18_CC_N: P1.C23
LA18_CC_P: P1.C22 U2.6 | length 1626.6
  TopLayer w11.83: U2.6@1594.08,2646.21 v2@1836.3,2646.21 ; v1(2468.17,1645.21) P1.C22@2488.78,1624.61
  BottomLayer w11.83: v2(1839,2643.5) 1839,2168.53 2009.16,1998.37 2009.16,1968.99 2199.23,1778.92 2278.49,1778.92 2334.47,1722.94 2334.47,1693.68 2382.94,1645.21 v1(2468.17,1645.21)
LA19_N: J1.80 P1.H23 | length 1971.7
  TopLayer w11.83: v1(520,1461.42) 575.42,1461.42 621,1507 657.29,1507 681.29,1531 1021.87,1531 1265.87,1775 v2@1977,1775 ; v1(2218.17,1654) P1.H23@2238.78,1674.61
  BottomLayer w11.83: v1(520,1461.42) J1.80@585.25,1461.42 ; v2(1977,1773) 2096,1654 v1(2218.17,1654)
LA19_P: P1.H22 U3.6 | length 1139.5
  TopLayer w11.83: U3.6@1593.08,2311.2 v2@1702.3,2311.2 ; v1(2218.17,1604) P1.H22@2238.78,1624.61
  BottomLayer w11.83: v2(1705,2313.91) 1705,2169.37 1915,1959.37 1915,1772.9 2083.9,1604 v1(2218.17,1604)
LA20_N: P1.G22 U3.8 | length 1215.2
  TopLayer w11.83: U3.8@1593.08,2362.39 1645.89,2362.39 1659.41,2375.91 v2(1757,2375.91) ; v1(2268.17,1645.21) P1.G22@2288.78,1624.61
  BottomLayer w11.83: v2(1757,2375.91) 1757,2170.63 1952.66,1974.97 1952.66,1834.27 2107.85,1679.08 2234.3,1679.08 v1(2268.17,1645.21)
LA20_P: P1.G21 U3.7 | length 1270.9
  TopLayer w11.83: U3.7@1593.08,2336.79 1651.79,2336.79 1659.91,2344.91 v2(1731,2344.91) ; P1.G21@2288.78,1574.61 v1(2309.39,1595.21)
  BottomLayer w11.83: v2(1731,2344.91) 1731,2170 1933.83,1967.17 1933.83,1780.93 2079.6,1635.17 2101.83,1635.17 2108.08,1628.92 2228.49,1628.92 2237.28,1620.13 2269.71,1620.13 2294.62,1595.21 v1(2309.39,1595.21)
LA21_N: P1.H26
LA21_P: P1.H25
LA22_N: P1.G25 U2.9 | length 1528.9
  TopLayer w11.83: U2.9@1594.08,2722.98 1645.98,2722.98 1659.5,2736.5 v2(1813,2736.5) ; v1(2268.17,1754) P1.G25@2288.78,1774.61
  BottomLayer w11.83: v2(1813,2736.5) 1813,2167.9 1990.33,1990.57 1990.33,1901.67 2171.7,1720.3 2234.47,1720.3 v1(2268.17,1754)
LA22_P: P1.G24
LA23_N: P1.D24 U3.3 | length 1116.4
  TopLayer w11.83: U3.3@1593.08,2234.43 1594.43,2233.08 1810.92,2233.08 1823.09,2220.91 v2@1887,2220.91 ; P1.D24@2438.78,1724.61 v1(2459.39,1745.21)
  BottomLayer w11.83: v2(1889,2220.91) 2093.26,2016.65 2093.26,1993.68 2107.85,1979.08 2110.75,1979.08 2234.47,1855.36 2234.47,1843.68 2261.57,1816.58 2349.89,1816.58 2421.25,1745.21 v1(2459.39,1745.21)
LA23_P: P1.D23 U2.7 | length 1613.5
  TopLayer w11.83: U2.7@1594.08,2671.8 1862.3,2671.8 v2(1865,2674.5) ; P1.D23@2438.78,1674.61 v1(2459.39,1695.21)
  BottomLayer w11.83: v2(1865,2674.5) 1864.08,2673.58 1864.08,2172.92 2158.08,1878.92 2169.71,1878.92 2184.47,1864.15 2184.47,1834.89 2221.61,1797.75 2342.09,1797.75 2444.62,1695.21 v1(2459.39,1695.21)
LA24_N: P1.H29
LA24_P: P1.H28 U2.8 | length 1265.3
  TopLayer w11.83: U2.8@1594.08,2697.39 1661.39,2697.39 1669.5,2705.5 v2@1943,2705.5 ; v1(2218.17,1945.21) P1.H28@2238.78,1924.61
  BottomLayer w11.83: v2(1945,2705.5) 1942.08,2702.58 1942.08,2242.85 2164.81,2020.13 2178.49,2020.13 2193.09,2005.53 2193.09,1970.3 v1(2218.17,1945.21)
LA25_N: P1.G28 U3.5 | length 865.2
  TopLayer w11.83: U3.5@1593.08,2285.61 v2@1962.3,2285.61 ; v1(2268.17,1945.21) P1.G28@2288.78,1924.61
  BottomLayer w11.83: v2(1967,2282.91) 1974.5,2282.91 2243.09,2014.32 2243.09,1970.3 v1(2268.17,1945.21)
LA25_P: P1.G27 U3.4 | length 917.2
  TopLayer w11.83: U3.4@1593.08,2260.02 1682.98,2260.02 1691.09,2251.91 v2@1913,2251.91 ; P1.G27@2288.78,1874.61 v1(2309.39,1895.21)
  BottomLayer w11.83: v2(1915,2251.91) 1915,2242.41 2143.09,2014.32 2143.09,1984.89 ; 2143.26,1984.89 2232.94,1895.21 v1(2309.39,1895.21)
LA26_N: P1.D27
LA26_P: P1.D26
LA27_N: P1.C27 U2.3 | length 1315.6
  TopLayer w11.83: U2.3@1594.08,2569.43 1872.57,2569.43 ; 1874.57,2569.43 1893.5,2550.5 v2(2023,2550.5) ; v1(2468.17,1895.21) P1.C27@2488.78,1874.61
  BottomLayer w11.83: v2(2023,2550.5) 2023,2384.41 2243.09,2164.32 2243.09,2135.06 2358.02,2020.13 2378.49,2020.13 2393.09,2005.53 2393.09,1970.3 v1(2468.17,1895.21)
LA27_P: P1.C26 U2.4 | length 1382.6
  TopLayer w11.83: U2.4@1594.08,2595.02 1981.48,2595.02 ; 1983.48,2595.02 v2(1997,2581.5) ; v1(2468.17,1845.21) P1.C26@2488.78,1824.61
  BottomLayer w11.83: v2(1997,2581.5) 1997,2351.62 2193.09,2155.53 2193.09,2120.3 2293.26,2020.13 2293.26,1993.68 2307.85,1979.08 2334.3,1979.08 v1(2468.17,1845.21)
LA28_N: P1.H32
LA28_P: P1.H31
LA29_N: P1.G31
LA29_P: P1.G30
LA30_N: P1.H35
LA30_P: P1.H34 U2.5 | length 914.2
  TopLayer w11.83: U2.5@1594.08,2620.62 1826.65,2620.62 1828.68,2618.58 v2@2040.92,2618.58 ; v1(2218.17,2245.21) P1.H34@2238.78,2224.61
  BottomLayer w11.83: v2(2049,2612.5) 2049,2449.62 2184.3,2314.32 2184.3,2279.08 v1(2218.17,2245.21)
LA31_N: P1.G34
LA31_P: P1.G33
LA32_N: P1.H38
LA32_P: P1.H37
LA33_N: P1.G37
LA33_P: P1.G36
NetC7_2: C7.2 U4.3 | length 193
  BottomLayer w11.83: C7.2@1127.12,484 1241,484 1279.84,522.84 U4.3@1279.84,547.02
PG_C2M: P1.D1
PG_M2C: P1.F1
PLLCLK: C7.1 J1.39 | length 2945.8
  BottomLayer w11.83: J1.39@810.75,2071.65 723.61,2071.65 711.85,2083.42 684.15,2083.42 615.73,2015 540,2015 316,1791 316,311 337,290 878,290 C7.1@1072,484
PLLCLK_OUT: J1.40
PRSNT_M2C_L: J1.160 P1.H2 | length 2120.8
  TopLayer w11.83: v1(496.17,400) 1167,400 v2(1181,386) ; v1(2218.17,604) P1.H2@2238.78,624.61
  BottomLayer w11.83: v1(496.17,400) 496.17,459.17 514.17,477.17 J1.160@585.25,477.17 ; v2(1181,386) 1518,386 1518,582.43 2154.5,582.43 2157.85,579.08 2193.26,579.08 v1(2218.17,604)
RX_CLK: J1.95 R2.1 U5.5 | length 888.1
  BottomLayer w11.83: J1.95@810.75,1303.94 928.06,1303.94 961,1271 961,1117.79 1006.58,1072.22 1006.58,902.54 1098.12,811 1220.91,811 1238.47,828.56 U5.5@1238.47,888.37
RX_CLK_2: J1.97 R2.2 | length 115.3
  BottomLayer w11.83: J1.97@810.75,1284.25 859.58,1284.25 905.88,1237.95 R2.2@905.88,1237
RX_EN: J1.77 U3.17 | length 1343.8
  TopLayer w11.83: v2(874.5,1488.1) 898.57,1512.17 1029.67,1512.17 1233.51,1716 v1(1296,1716) ; v1@1296.61,2362.39 U3.17@1352.92,2362.39
  BottomLayer w11.83: J1.77@810.75,1481.1 869.5,1481.1 v2@874.5,1486.1 ; v1(1296,1716) 1225,1787 1225,2292 v1(1296,2363)
RX_IQ_SEL: J1.79 R9.1 R10.1 | length 430.3
  TopLayer w11.83: v2(934,1426) R9.1@1178.71,1426 ; R10.1@1179,1379 R9.1@1179,1426.71
  BottomLayer w11.83: J1.79@810.75,1461.42 898.58,1461.42 v2(934,1426)
RX_IQ_SEL_CLK: R8.2 R10.2 | length 1090.4
  TopLayer w11.83: R10.2@1179,1323.88 1215,1323.88 1298.97,1239.92 1540.08,1239.92 1816,964 1816,768 v1(1842,742)
  BottomLayer w11.83: v1(1842,742) 1875,709 R8.2@1899.88,709
RXCLK_OUT: J1.120 R5.2 | length 1675
  BottomLayer w11.83: J1.120@585.25,870.87 636.87,870.87 649,883 649,957.27 684.15,992.42 697.42,992.42 724,1019 724,1029.8 760.65,1066.45 894.55,1066.45 932.34,1028.66 932.34,923.52 1083.85,772 1763,772 1874,661 R5.2@1899.88,661
SCL: P1.C30
SDA: P1.C31
SPI_CLK: J1.90 U3.21 | length 2326.7
  TopLayer w11.83: v1(354,1317) 354,2234.43 379.59,2260.02 U3.21@1352.92,2260.02
  MidLayer1 w11.83: v1(354,1317) 400.88,1317 427.4,1290.48 576.48,1290.48 v1(649,1362.99)
  BottomLayer w11.83: J1.90@585.25,1362.99 v1(649,1362.99)
SPI_FSS: J1.84 U3.19 | length 2385.7
  TopLayer w11.83: v1(288,1423) 332,1467 332,1526 317.81,1540.19 317.81,2270.62 358.39,2311.2 U3.19@1352.92,2311.2
  MidLayer1 w11.83: v1(288,1423) 412.99,1423 427.4,1408.59 478.54,1408.59 509.68,1377.45 604.4,1377.45 v1(649,1422.05)
  BottomLayer w11.83: J1.84@585.25,1422.05 v1(649,1422.05)
SPI_RX: J1.86 U1.20 | length 2125.4
  TopLayer w11.83: v1(397,1398) 397,1211.24 432.82,1175.42 432.82,1153.82 397.09,1118.09 397.09,469.09 420.45,445.74 1203.26,445.74 1270.39,378.61 U1.20@1333.92,378.61
  BottomLayer w11.83: v1(397,1398) 404.36,1405.36 517,1405.36 520,1402.36 J1.86@585.25,1402.36
SPI_TX: J1.85 U3.20 | length 1370.4
  TopLayer w11.83: v2(903,1400) 909.08,1406.08 909.08,1455.92 927.67,1474.5 1053.5,1474.5 1233,1654 v1(1322,1654) ; U3.20@1352.92,2285.61 1409.39,2285.61 v1(1410,2285)
  BottomLayer w11.83: J1.85@810.75,1402.36 v2@903,1402.36 ; v1(1322,1654) 1361,1693 1361,2236 v1(1410,2285)
SPISEL: J1.92 U2.14 | length 2859.7
  TopLayer w11.83: v1@179,1343.31 179,2468.57 515.01,2804.58 622.23,2804.58 652.66,2774.16 U2.14@1353.92,2774.16
  MidLayer1 w11.83: v1(180,1343.31) 183,1346.31 517,1346.31 v1(520,1343.31)
  BottomLayer w11.83: v1(520,1343.31) J1.92@585.25,1343.31
TRX_RESET: J1.83 U3.16 | length 1429.9
  TopLayer w11.83: v2(874.5,1429.05) 874.5,1450.93 916.9,1493.34 1041.17,1493.34 1232.83,1685 v1(1270,1685) ; v1(1270,2388) U3.16@1352.9,2388
  BottomLayer w11.83: J1.83@810.75,1422.05 867.5,1422.05 v2(874.5,1429.05) ; v1(1270,1685) 1194,1761 1194,2312 v1(1270,2388)
TX_CLK: J1.96 R3.2 R4.2 | length 609.1
  BottomLayer w11.83: J1.96@585.25,1303.94 634.08,1303.94 642.92,1295.1 642.92,1186.08 686,1143 844.63,1143 936.51,1051.12 R4.2@979.88,1051.12 ; R3.2@980,1005.12 R4.2@980,1051
TX_EN: J1.78 U3.18 | length 2309.3
  TopLayer w11.83: v1(288,1524) 288,1518 290,1516 290,1579.53 298.98,1588.51 298.98,2287.98 347.79,2336.79 U3.18@1352.92,2336.79
  MidLayer1 w11.83: v1(288,1524) 288,1518 293.47,1523.47 481.76,1523.47 509.68,1495.56 634.55,1495.56 v1(649,1481.1)
  BottomLayer w11.83: J1.78@585.25,1481.1 v1(649,1481.1)
UART_RX: J1.91 U2.17 | length 2883.4
  TopLayer w11.83: v1(272,1468) 260,1480 260,1591 272,1603 272,2453 516.39,2697.39 U2.17@1353.92,2697.39
  MidLayer1 w11.83: v1(272,1468) 272.36,1467.64 478.54,1467.64 509.68,1436.5 618.99,1436.5 638.68,1456.19 659.32,1456.19 671.05,1467.92 737.63,1467.92 776,1429.55 776,1381.3 v2(745.7,1351)
  BottomLayer w11.83: v2(745.7,1351) 753.39,1343.31 J1.91@810.75,1343.31
UART_TX: J1.89 U1.21 | length 2341.3
  TopLayer w11.83: v1(407.91,1165.09) 378.26,1135.45 378.26,451.74 403.09,426.91 1182.09,426.91 1255.98,353.02 U1.21@1333.92,353.02
  MidLayer1 w11.83: v1(407.91,1165.09) 673.14,1165.09 v2@876.27,1368.22
  BottomLayer w11.83: J1.89@810.75,1362.99 867.5,1362.99 v2(874.5,1369.99)
UC_DATA0: J1.107
UC_DATA1: J1.108
UC_DATA2: J1.109
UC_DATA3: J1.110
UC_DATA4: J1.113
UC_DATA5: J1.114
UC_DATA6: J1.115 U2.16 | length 3512.3
  TopLayer w11.83: v1(241,975.52) 241,2458.19 549.72,2766.92 606.63,2766.92 650.57,2722.98 U2.16@1353.92,2722.98
  MidLayer1 w11.83: v1(241,975.52) 781.48,975.52 846.76,910.24 v1(897.69,910.24)
  BottomLayer w11.83: J1.115@810.75,910.24 v1(897.69,910.24)
UC_NMI: J1.119 U2.15 | length 3610.7
  TopLayer w11.83: v1(210,968) 210,2463.38 532.37,2785.75 614.43,2785.75 651.62,2748.57 U2.15@1353.92,2748.57
  MidLayer1 w11.83: v1(210,968) 210,963.76 250.76,923 572,923 630.36,864.64 891.46,864.64 v1(897.69,870.87)
  BottomLayer w11.83: J1.119@810.75,870.87 v1(897.69,870.87)
UC_PKT_DET: J1.116
UHF_ANT_CTRL: J1.104
UHF_PA2_CTRL: J1.103
VADJ: C1.2 C2.2 C3.2 C16.2 C17.2 C18.2 C19.2 J1.131 J1.133 P1.E39 P1.F40 P1.G39 P1.H40 U1.1 U2.1 U2.2 U3.1 U3.2 U5.2 U5.6 U5.14 U5.18 | length 4293.9
  TopLayer w11.83: U1.1@1574.08,276.25 1625.75,276.25 v1(1639,263) C3.2@1684.88,263 ; U3.1@1593.08,2183.25 1665.75,2183.25 v1(1680,2169) 1694.88,2169 C2.2@1722.88,2197 1711.88,2208 v2(1680,2208) ; U3.2@1593.08,2208.84 v2@1679.16,2208.84 ; U2.1@1594.08,2518.25 1631.75,2518.25 v1(1649,2501) ; U2.2@1594.08,2543.84 v1@1657.16,2543.84 ; v1(1658,2543) 1691.88,2543 C1.2@1702.88,2532 1702.88,2525.88 v1(1677,2500) ; v4(2218.17,2504) P1.H40@2238.78,2524.61 v4(2259.39,2545.21) ; v4(2268.17,2495.21) P1.G39@2288.78,2474.61 v4(2309.39,2454) ; v4(2318.17,2504) P1.F40@2338.78,2524.61 v4(2359.39,2545.21) ; v4(2368.17,2495.21) P1.E39@2388.78,2474.61
  MidLayer1 w30: 1413,783 1535,661 1535,310 1582,263 v1(1639,263) ; v1(1624,2500) v1@1646,2500 ; v1(1646,2165) v1@1646,2500 ; v1@1646,2501 v1@1646,2500 ; v4(2218.17,2504) 2214.17,2500 v1(1677,2500) v1@1646,2500
  BottomLayer w11.83: v3(733,768) 748.24,752.76 J1.131@810.75,752.76 873.26,752.76 ; v3(734,734) 734.93,733.07 J1.133@810.75,733.07 873.26,733.07 ; v1(1191,1076) 1220.12,1076 C16.2@1229,1084.88 ; v1(1196,875) 1204.12,866.88 C18.2@1204.12,842 1218.79,856.67 U5.6@1218.79,888.37 ; U5.14@1238.47,1042.1 C16.2@1238.47,1074.35 ; U5.2@1297.53,888.37 1297.53,863.47 v1(1304,857) 1304,825.88 C17.2@1309.88,820 ; C19.2@1305,1085.88 1317.21,1073.67 U5.18@1317.21,1042.1 ; C19.2@1317.88,1073 v1(1339,1073)
  BottomLayer w30: v1@1410,1037 1410,2096 1500,2186 1618,2186
  other v1: 1411,1037 1411,1063 1401,1087 1660,2135
  other v3: 931,727 932,760
  other v6: 1053,311
VIO_B_M2C: P1.J39 P1.K40 | length 70.7
  TopLayer w11.83: P1.K40@2138.78,2524.61 P1.J39@2188.78,2474.61
VREF_A_M2C: P1.H1
VREF_B_M2C: P1.K1
WIFI_ANT_CTRL: J1.102
WIFI_PA_CTRL: J1.101
pads on no net: F1.0 F2.0 F3.0 J1.1 J1.2 J1.3 J1.4 J1.5 J1.6 J1.7 J1.8 J1.9 J1.10 J1.11 J1.12 J1.25 J1.27 J1.29 J1.31 J1.33 J1.34 J1.35 J1.36 J1.37 J1.38 J1.98 J1.125 J1.126 J1.127 J1.128 J1.137 J1.138 J1.139 J1.140 J1.143 J1.144 J1.145 J1.146 J1.149 J1.150 J1.151 J1.152 J1.155 J1.156 J1.157 J1.158 J1.173 J1.174 P1.B20 P1.B21 P1.B40 P1.MH1 P1.MH2 U1.14 U1.15 U1.16 U1.17 U1.18 U1.19 U3.9 U3.10 U3.14 U3.15 U4.5 U4.10 U4.13 U4.15 U4.17 U5.10 U5.13 U5.15 U5.17
copper on no net:
  other v5: 135,150 698,150 135,2950 698,2950

## Polygon pours and split planes (outlines as drawn)
VADJ on BottomLayer "MidLayer2-No Net" (solid, pour order 37): 1693,2242.41 1687,2234.76 1575,2234.76 1575,2191.42 1632,2118.75 1642,2106 1703,2106
VADJ on BottomLayer "MidLayer1-No Net" (solid, pour order 33): 873.26,783 873.26,726.21 873.93,722.89 876.73,709 948,709 948,776.12 946.96,781.28
VADJ on BottomLayer "BottomLayer-No Net" (solid, pour order 27): 1304,1115 1304,1011 1462.76,1011 1464,1012.24 1463,1013.24 1463,1229
VADJ on BottomLayer "MidLayer1-No Net" (solid, pour order 32): 673.88,780.72 673.88,723.93 674.61,720.61 677.7,706.72 756,706.72 756,773.84 754.85,779
GND on BottomLayer "BottomLayer-No Net" (solid, remove dead copper, pour order 23): 1271,2895 1271,204 131,204 129,2895
VADJ on TopLayer "MidLayer2-No Net" (solid, pour order 31): 1682.98,2199 1682.98,2186.02 1723,2146 1678,2101 1661.39,2101 1658,2101 1586,2173 1585,2172 1553,2172 1553,2217.5 1683,2217.5
VADJ on TopLayer "MidLayer2-No Net" (solid, pour order 34): 1690,2550.5 1690,2509 1713,2486 1668,2441 1668,2436 1655,2436 1604,2487 1603,2486 1555,2486 1555,2550.5
VADJ on TopLayer "MidLayer2-No Net" (solid, pour order 35): 1690,2550.5 1723,2517.5 1723,2489 1723,2476 1680,2433 1627,2486 1555,2486 1555,2550.5
VADJ on MidLayer1 "MidLayer1-No Net" (solid, pour order 30): 627,819.05 639.98,841 1113,841 1113,519.8 1065.82,440 1063.46,443.99 627,443.99
VADJ on MidLayer1 "MidLayer1-No Net" (solid, pour order 29): 1528.1,2643 2437.45,2643 2441,2640.93 2441,2116 1542.31,2116 1521,2128.4
VADJ on MidLayer1 "MidLayer2-No Net" (solid, pour order 36): 1698,2537 1698,2466 1695,2463 1692,2460 1595,2460 1595,2533 1600,2538
VADJ on MidLayer1 "MidLayer2-No Net" (solid, pour order 38): 1435,1124 1435,771 1432,768 1416.76,752.76 1025,752.76 1025,1125 1028,1128
VADJ on MidLayer1 "MidLayer1-No Net" (solid, pour order 26): 1001.71,1169.73 1008.24,1184 1561.65,1184 1561.65,235.05 1569,219 1563.29,231.49 996,231.49
12P0V on MidLayer2 "MidLayer2-No Net" (solid, pour order 28): 2176,2883 2691,2883 2694,2880 2693.79,2879.79 2693.79,2730 2324,2703
3P3V on MidLayer2 "MidLayer2-No Net" (solid, pour order 22): 2250,2350 2259.39,2340.61 2259.39,2304 2444,2304 2450,2310 2450,2400 2450,2401 2605,2556 2526,2635 2500,2635 2420,2635 2419,2634 2419,2441 2333,2355 2328,2350 2327.78,2350
3P3V on MidLayer2 "MidLayer2-No Net" (solid, pour order 25): 950.76,2426.76 1158,2635 2395.69,2634 2419,2634 2423,2630 2423,2418
12P0V on MidLayer2 "MidLayer2-No Net" (solid, pour order 20): 2415,2390.93 2593.38,2545.21 2693.75,2545.21 2694,2544.99 2694,2149 2415.73,2149
12P0V on MidLayer2 "MidLayer2-No Net" (solid, pour order 21): 2694,2545 2693.79,2545.21 2693.79,2730 2333,2730 2178,2885 2176,2883 190,2883 190,493 247,436 669,436 669,2207 1045,2583 1109,2647 1818,2647 2526.97,2647 2628.76,2545.21
3P3V on MidLayer2 "MidLayer2-No Net" (solid, remove dead copper, pour order 24): 2404.76,2426.76 950.76,2426.76 719,2170.81 722,2167.5 722,226 2374,226 2398,252.51
GND on GroundPlane1 (split plane): 904.28,3074.47 906.21,3061.82 908.89,3049.31 912.33,3036.98 916.5,3024.88 921.4,3013.06 927,3001.56 933.29,2990.41 940.24,2979.67 947.82,2969.36 956.01,2959.53 964.78,2950.21 974.1,2941.44 983.93,2933.25 994.23,2925.67 1004.98,2918.72 1016.13,2912.43 1027.63,2906.83 1039.45,2901.94 1051.55,2897.76 1063.87,2894.33 1076.38,2891.64 1089.03,2889.72 1101.78,2888.56 1114.56,2888.17 1114.57,2888.17 2694.08,2888.17 2694.08,211.83 1114.57,211.83 1114.56,211.83 1101.78,211.44 1089.03,210.28 1076.38,208.36 1063.87,205.67 1051.55,202.24 1039.45,198.06 1027.63,193.17 1016.13,187.57 1004.98,181.28 994.23,174.33 983.93,166.75 974.1,158.56 964.78,149.79 956.01,140.47 947.82,130.64 940.24,120.33 933.29,109.59 927,98.44 921.4,86.94 916.5,75.12 912.33,63.02 908.89,50.69 906.21,38.18 904.28,25.53 903.79,20.1 20.1,20.1 20.1,3079.9 903.79,3079.9
GND on GroundPlane2 (split plane): 904.28,3074.47 906.21,3061.82 908.89,3049.31 912.33,3036.98 916.5,3024.88 921.4,3013.06 927,3001.56 933.29,2990.41 940.24,2979.67 947.82,2969.36 956.01,2959.53 964.78,2950.21 974.1,2941.44 983.93,2933.25 994.23,2925.67 1004.98,2918.72 1016.13,2912.43 1027.63,2906.83 1039.45,2901.94 1051.55,2897.76 1063.87,2894.33 1076.38,2891.64 1089.03,2889.72 1101.78,2888.56 1114.56,2888.17 1114.57,2888.17 2694.08,2888.17 2694.08,211.83 1114.57,211.83 1114.56,211.83 1101.78,211.44 1089.03,210.28 1076.38,208.36 1063.87,205.67 1051.55,202.24 1039.45,198.06 1027.63,193.17 1016.13,187.57 1004.98,181.28 994.23,174.33 983.93,166.75 974.1,158.56 964.78,149.79 956.01,140.47 947.82,130.64 940.24,120.33 933.29,109.59 927,98.44 921.4,86.94 916.5,75.12 912.33,63.02 908.89,50.69 906.21,38.18 904.28,25.53 903.79,20.1 20.1,20.1 20.1,3079.9 903.79,3079.9

## Keep-outs
TopLayer:
  region: 2285.04,195.67 cw(c2285.04,309.84) 2170.87,309.84 cw(c2285.04,309.84) 2285.04,424.02 cw(c2285.04,309.84) 2399.21,309.84 cw(c2285.04,309.84)
  region: 2285.04,2675.98 cw(c2285.04,2790.16) 2170.87,2790.16 cw(c2285.04,2790.16) 2285.04,2904.33 cw(c2285.04,2790.16) 2399.21,2790.16 cw(c2285.04,2790.16)
KeepOutLayer:
  circle w26: c2243.7,2620.08 r37
  circle w23: c2363.78,479.13 r37
  circle w30: c135.43,2634.65 r70
  circle w30: c135.43,408.27 r70

## Other copper
MidLayer2:
  pour cut-out: 1513,1134 1510,1134 1512,1039.54 1515,870 1484,488 1481,212 2413,222 2409.39,845.21 2418.17,1154 2027.94,1159 1538,1159
BottomLayer:
  text "REG - 01/08/2014" at 1564,2067.21 h40 r90
  text "WAB 1:1 Rev C" at 1497,2066 h40 r90

## Silkscreen, mask and mechanical layers (free items; w line width, h text height)
TopOverlay:
  text "VADJ" at 908,377 h60
BottomOverlay:
  lines w8: 1560,2115 1601,2115 ; 1750,602 1774,602 ccw(c1774,722.71) 1859.36,637.36 ; 1919,1679 ccw(c1919,1727.28) 1953.14,1693.14 1961,1701 ccw(c1927.2,1734.8) 1975,1734.8 1975,1746 ; 1956,872 cw(c1956,792.33) 2012.33,848.67 2039.39,821.61 cw(c2013.79,796) 2050,796 ; 2075.3,899 cw(c2075.3,827.3) 2126,878 ccw(c2186.36,938.36) 2186.36,853 2193,853 ; 2133,1294 2239.3,1294 cw(c2239.3,1222.3) 2290,1273
  text "t0" at 1544,2096 h40
  text "TXIQSEL" at 1899,1656 h40
  text "RXIQSEL" at 2115,1275 h40
  text "r0" at 2055,883 h40
  text "RXCLK" at 1941,840 h40
  text "RXCLKOUT" at 1688,594 h40 r270
  text "VADJ" at 1120,378 h60
Outline:
  the board outline again, w5